# Altium PCB PCB2.PcbDoc
Units mil, origin at the board's own origin, x right, y up, seen from the top; angles counter-clockwise.
Board outline 2379.98 x 1349.93 mil, 2 copper layers (Top Layer, Bottom Layer); 15 components, 11 nets, 41 pads, 11 vias.
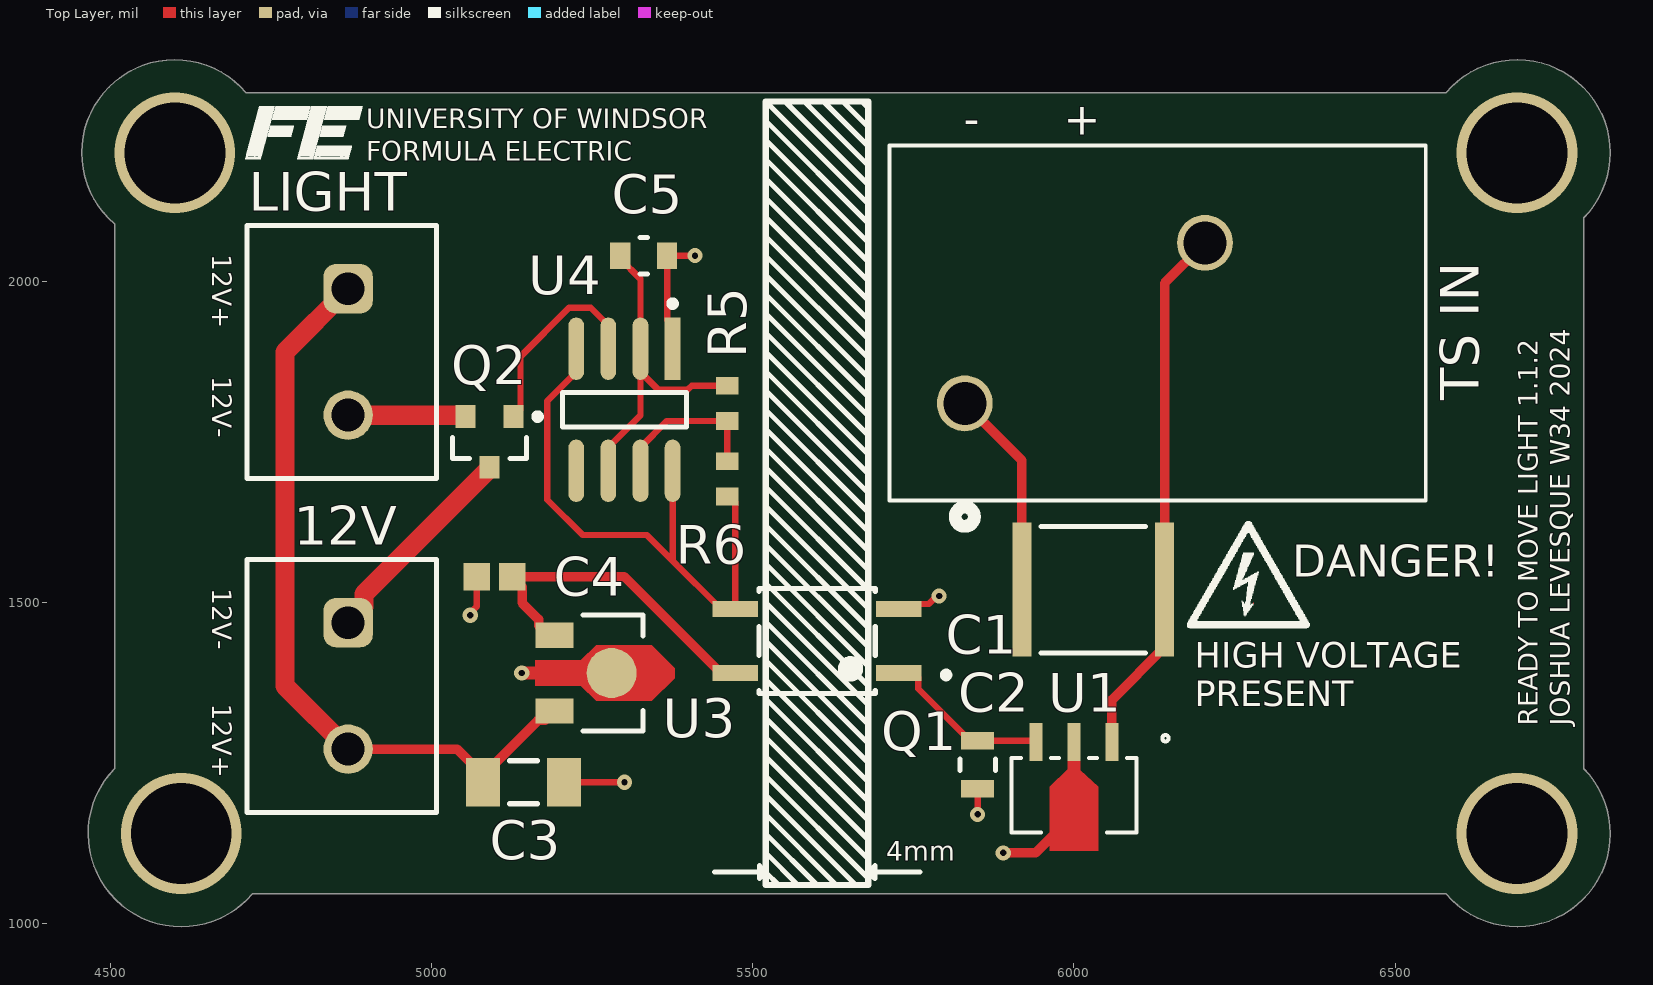
[diagram p0: Top Layer view]
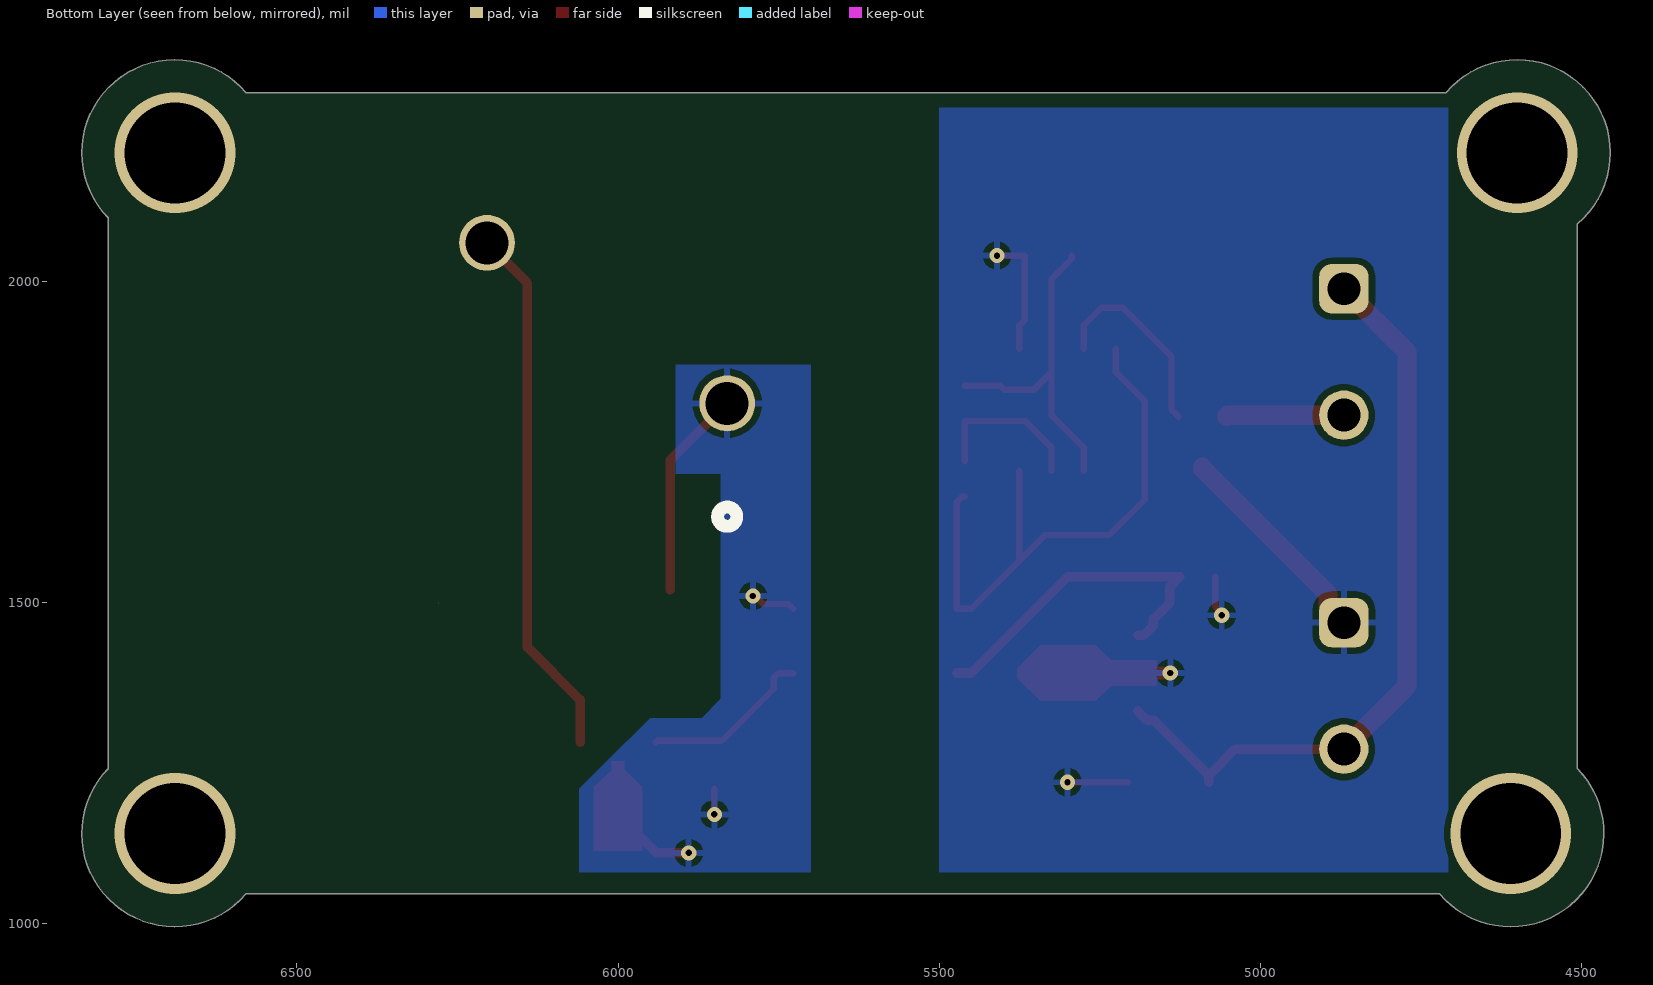
[diagram p1: Bottom Layer view, seen from below]
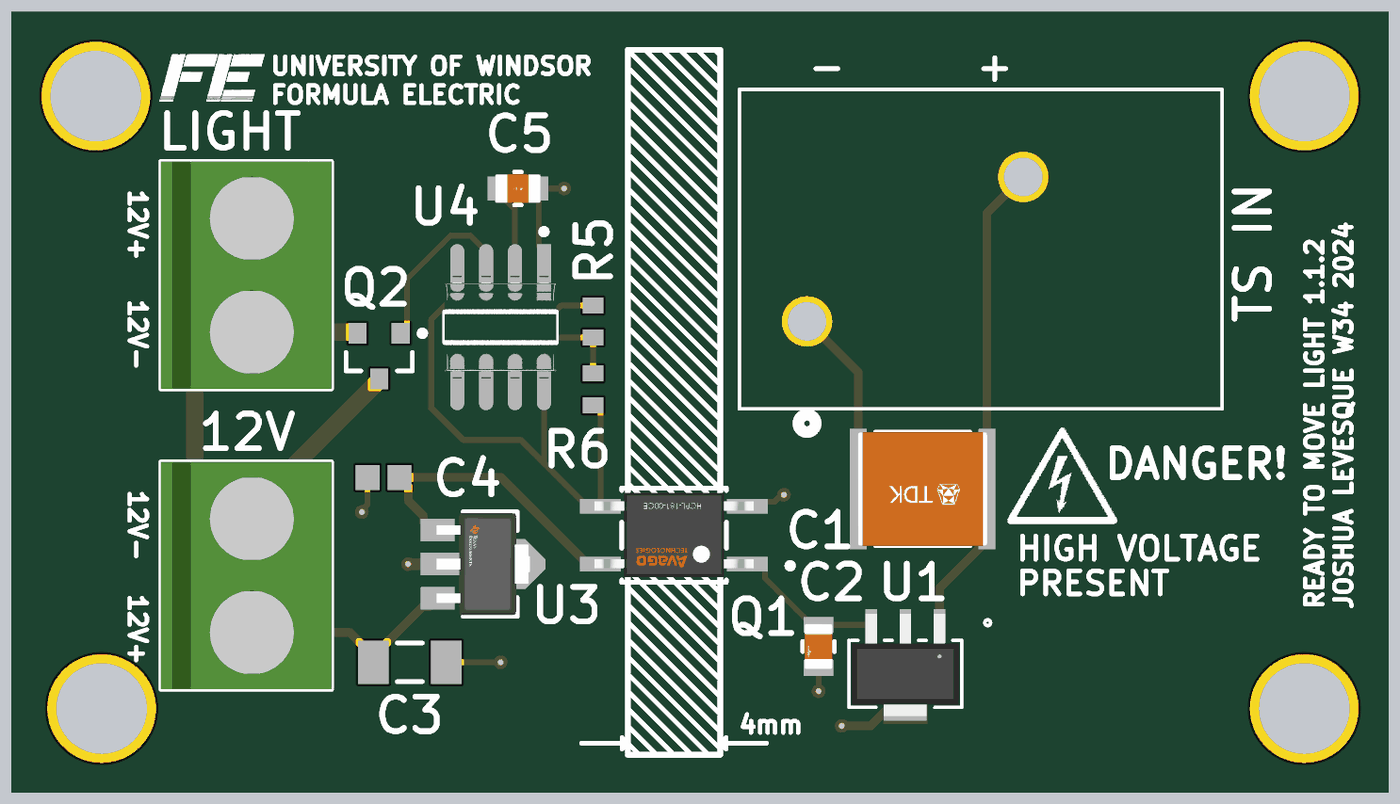
[diagram p2: 3D render of the assembled board from above, using the file's embedded part models]

## Layer stack, top to bottom
Top Solder: solder mask 0.4, Solder Resist, Dk 3.5
Top Layer: signal copper 1.4
Dielectric 1: dielectric 12.6, FR-4, Dk 4.8
Bottom Layer: signal copper 1.4
Bottom Solder: solder mask 0.4, Solder Resist, Dk 3.5

## Board outline
4506.05,1241.11 ccw(c4610,1140) 4720.46,1046.05 6579.54,1046.05 ccw(c6690,1140) 6835.02,1140 ccw(c6690,1140) 6793.95,1241.11 6793.95,2098.89 ccw(c6690,2200) 6835.02,2200 ccw(c6690,2200) 6579.54,2293.95 4710.46,2293.95 ccw(c4600,2200) 4506.05,2089.54

## Design rules (kind name [scope] priority, off if disabled: settings)
Clearance [All] p1: gap=10 ignorepadtopadclearanceinfootprint=FALSE
PolygonConnect [All] p1: connectstyle=Relief reliefconductorwidth=10 reliefentries=4 polygonreliefangle="90 Angle" airgapwidth=10
RoutingVias [All] p1: holewidth=28 width=50 viastyle="Through Hole" minholewidth=28 minwidth=50 maxholewidth=28 maxwidth=50
SolderMaskExpansion [All] p1: expansion=4 istentingtop=FALSE
SupplyNets "Schematic Supply Nets_4" [InNet('-12V')] p1: voltage=0.000
SupplyNets "Schematic Supply Nets_3" [InNet('TS+')] p2: voltage=0.000
SupplyNets "Schematic Supply Nets_2" [InNet('+12V')] p3: voltage=0.000
SupplyNets "Schematic Supply Nets_1" [InNet('TS-')] p4: voltage=0.000
SupplyNets "Schematic Supply Nets" [InNet('+5V')] p5: voltage=0.000
Width [All] p1: maxlimit=10 minlimit=10 preferedwidth=10
30 further rules are at their usual default settings.

## Components (designator, comment, footprint, x,y, rotation, side; value= is the part's Value field where it differs from the comment)
12V "691137710002" 691137710002 4860,1370 r270 top
C1 "2.2uF" FP-C5750-250-0_4-IPC_C 6030,1520 r180 top
C2 "22uF" FP-GRM21B-0_15-MFG 5850,1247.4 r270 top
C3 "CAP 330nF 16V 1206(3216)" CAPC1206(3216)110_M 5142.99,1220 r0 top value=330nF
C4 "VJ0603V104ZXXCW1BC" CAPC1608X95X40ML15T15 5097.56,1540 r180 top
C5 "C2012X5R1E106M125AB" FP-C2012-125-0_2-MFG 5330,2040 r180 top
LIGHT "691137710002" 691137710002 4860,1890 r270 top
Q1 "HCPL-181-00CE" FP-SO-4-MFG 5600,1440 r180 top
Q2 "NTR4170NT1G" ONSC-SOT-23-3-318-08_V 5090,1750 r270 top
R5 "RC0603FR-0724KL" RESC1608X55X25NL10T15 5460,1810 r90 top
R6 "RC0603FR-0724KL" RESC1608X55X25NL10T15 5460,1692.44 r90 top
"TS IN" "1017514" CONN_1017514 5830,1810 r90 top
U1 "" SOT-89-3_2P7X4P7_ONS 6000,1200 r180 top
U3 "UA78L05AIPK" FP-PK0003A-MFG 5277.73,1390 r270 top
U4 "NE555DR" FP-D0008A-IPC_A 5300,1800 r270 top

## Footprints (in the part's own frame and the unit in brackets; to place one, negate y for a bottom-side part, rotate by r counter-clockwise, add the part's x,y. Pads: shape width x height; smd on the part's side, far side on the other; paste and mask are expansions set on the pad)
691137710002 [mm] "Horizontal Cable Entry with Pressure Clamp, pitch 5mm, 02p"
  rrect50% 1.95x1.95 hole 1.3: 1(-2.5,0.25)
  round 1.95 hole 1.3: 2(2.5,0.25)
  silkscreen extent -5,-3.75 5,3.75, body extent -5,-3.75 5,3.75, height 11.6
CAPC1206(3216)110_M [mm] "Chip Capacitor, Body 3.2x1.6mm, Height 1.1mm, IPC Low Density"
  rect 1.35x1.9 smd: 1(-1.6,0) 2(1.6,0)
  silkscreen extent -0.55,-0.85 0.55,0.85, body extent -1.7,-0.9 1.7,0.9, height 1.1
CAPC1608X95X40ML15T15 [mm] "Chip Capacitor, 2-Leads, Body 1.60x0.80mm, IPC Low Density"
  rect 1.05x1.1 smd: 1(-0.7,0) 2(0.7,0)
  body extent -0.88,-0.48 0.87,0.47, height 0.95
CONN_1017514 [mil]
  round 87 / inner round 60 / far side round 87 hole 67 paste-99999 mask+0: 1(0,0) 2(250,-374.02)
  silkscreen extent -191,-718 402,117
FP-C2012-125-0_2-MFG [mm]
  rect 0.8x1.05 smd paste+0 mask+0: 1(-0.925,0) 2(0.925,0)
  silkscreen extent -0.15,-0.72 0.15,0.72, body extent -1.43,-0.82 1.43,0.82, height 0.25
FP-C5750-250-0_4-IPC_C [mm]
  rect 0.753x5.303 smd paste+0 mask+0: 1(-2.825,0) 2(2.825,0)
  silkscreen extent -2.07,-2.5 2.07,2.5, body extent -3.3,-2.8 3.3,2.8, height 0.25
FP-D0008A-IPC_A [mil]
  rect 97.21x24.49 smd paste+0 mask+0: 1(-95.02,75)
  rrect100% 97.21x24.49 smd paste+0 mask+0: 2(-95.02,25) 3(-95.02,-25) 4(-95.02,-75) 5(95.02,-75) 6(95.02,-25) 7(95.02,25) 8(95.02,75)
  silkscreen extent -170,-97 27,97, body extent -163,-116 163,116, height 10
FP-GRM21B-0_15-MFG [mm]
  rect 0.7x1.3 smd paste+0 mask+0: 1(-0.95,0) 2(0.95,0)
  silkscreen extent -0.23,-0.7 0.23,0.7, body extent -1.4,-0.8 1.4,0.8, height 0.25
FP-PK0003A-MFG [mm]
  rect 1x1.5 smd paste+0 mask+0: 1(-1.5,-2.203) 3(1.5,-2.203)
  round 1.98 smd paste+0 mask+0: 2(0,0.058)
  Top Layer region: -0.5,-2.953 -0.5,-1.152 -1.1,-0.553 -1.1,1.647 -0.2,2.548 0.2,2.548 1.1,1.647 1.1,-0.553 0.5,-1.152 0.5,-2.953
  silkscreen extent -2.3,-1.08 2.3,1.3, body extent -2.55,-3.05 2.55,2.65, height 0.25
FP-SO-4-MFG [mm]
  rect 1.8x0.64 smd paste+0 mask+0: 1(-3.23,1.27) 2(-3.23,-1.27) 3(3.23,-1.27) 4(3.23,1.27)
  silkscreen extent -5.23,-2.07 2.3,2.07, body extent -4.23,-2.17 4.23,2.17, height 0.25
ONSC-SOT-23-3-318-08_V [mm] "SOT23, 3-Leads, Body 2.92x1.3mm, Pitch 0.95mm"
  rect 0.9x0.8 smd: 1(-1,0.95) 2(-1,-0.95) 3(1,0)
  silkscreen extent -1.12,-1.46 0.65,2.03, body extent -0.65,-1.46 0.65,1.46, height 1.11
RESC1608X55X25NL10T15 [mm] "Chip Resistor, 2-Leads, Body 1.60x0.80mm, IPC Medium Density"
  rect 0.7x0.9 smd: 1(-0.7,0) 2(0.7,0)
  body extent -0.85,-0.45 0.85,0.45, height 0.55
SOT-89-3_2P7X4P7_ONS [mil]
  rect 20x59 smd paste+0 mask+0: 1(-59.06,-82.5) 2(0,-82.5) 3(59.06,-82.5)
  Top Layer region: 10,-53 -10,-53 -10,-39 -38,-13 -38,87 38,87 38,-13 10,-40
  silkscreen extent -148,-93 98,58, body extent -93,-104 93,73, height 69

## Part data
12V LIGHT: library part CMP-1502-03324-2, Current Rating=16A, Max Operating Temperature=120°C, Min Operating Temperature=-30°C, Voltage Rating=300V, Contact Material="Nickel, Tin", Height=11.6mm, Lead Pitch=5mm, NexarPartId=78871135, Number of Contacts=2, Number of Pins=2, Number of Rows=1, Packaging=Box, RoHS=Non-Compliant
C1: library part CMP-08246-007091-1, "Multilayer Ceramic Capacitors 2.2uF ±20% 450V X6S SMD 2220", Case Code (Imperial)=2220, Case Code (Metric)=5750, Max Operating Temperature=105°C, Min Operating Temperature=-55°C, Package Quantity=500, Tolerance=20%, Voltage Rating=450V, Capacitance=2.2uF, Case/Package=2220, Length=0.224inch, Mount="Surface Mount", Packaging="Tape and Reel", RoHS Compliant=Yes, Series=C, Thickness=0.11inch, Width=0.197inch
C2: library part CMP-2007-03385-2, "Chip Multilayer Ceramic Capacitors for General Purpose, 0805, 22uF, X5R, 15%, 20%, 6.3V", Case Code (Imperial)=0805, Case Code (Metric)=2012, Dielectric=X5R, Max Operating Temperature=85°C, Min Operating Temperature=-55°C, Package Quantity=1, Tolerance=20%, Voltage=6.3V, Capacitance=22uF, Case/Package=0805, Depth=1.25mm, Height=1.25mm, Lead Free="Lead Free", Length=2mm, Material=Ceramic, Mount="Surface Mount", Packaging="Tape and Reel", Radiation Hardening=No, REACH SVHC="No SVHC", Termination=SMD/SMT, Thickness=0.053inch, Voltage Rating=6.3V, Voltage Rating (DC)=6.3V, Width=0.049inch
C3: library part CMP-1037-04464-1, "CAP 330nF 16V ±10% 1206 (3216 Metric) Thickness 1.05mm SMD", Case-EIA=1206, Case-Metric=3216, Rated Voltage="16 V", Tolerance=Â±10%, Max Thickness="1.05 mm", Technology=SMT
C4: library part CMP-1035-02590-2, Manufacturer=Vitramon, Part Number=VJ0603V104ZXXCW1BC
C5: library part CMP-08246-005781-1, "Multilayer Ceramic Capacitors 10μF ±20% 25V X5R SMD 0805", Capacitance=10uF, Case Code (Imperial)=0805, Case Code (Metric)=2012, Dielectric=X5R, Dielectric Material=Ceramic, Max Operating Temperature=85°C, Min Operating Temperature=-55°C, Package Quantity=1, Tolerance=20%, Voltage Rating=25V, Case/Package=0805, Depth=1.25mm, Height=1.25mm, Lead Free="Lead Free", Length=2mm, Mount="Surface Mount", Packaging="Tape and Reel", Resistor Type=Ceramic, RoHS Compliant=Yes, Series=C, Termination=SMD/SMT, Thickness=0.057inch, Voltage Rating (DC)=25V, Weight=0.000194oz, Width=1.2mm
Q1: library part CMP-18400-000021-1, "OPTOISO 3.75KV TRANS 4MINIFLAT", Ambient Temperature Range High=+100°C, Ambient Temperature Range Low=-55°C, Collector Emitter Voltage=80V, Emiiter Collector Voltage=6V, Forward Current=20mA, Forward Voltage=1.2V, Isolation Voltage=3750Vrms, Manufacturer=Broadcom, Max Current Transfer Ratio=400%, Min Current Transfer Ratio=200%, Package=SO-4, Power Dissipation=170mW, Temperature="-55°C to +100°C", Automotive=No, Category=Trans, ComponentLink2Description=Datasheet, ComponentLink2URL=https://docs.broadcom.com/docs/AV02-0774EN, Device Class L1=Optoelectronics, Device Class L2=Optocouplers, Device Class L3=unset, Digikey Description="OPTOISO 3.75KV TRANS 4MINIFLAT", Height=2.4mm, Ipc Land Pattern Name=SOIC254P700X210-4, Lead Free=Yes, Manufacturer Part Number=HCPL-181-00CE, Mouser Description="Transistor Output Optocouplers 3750 Vrms 0.2mA", Octopart=https://octopart.com/hcpl-181-00ce-broadcom-71128032, Reverse Voltage=6V, RoHS=TRUE, Standoff Height=0mm, Temperature Range High=+100°C, Temperature Range Low=-55°C, Turn Off Delay Time=4us, Turn On Delay Time=3us
Q2: library part CMP-1058-00736-1, "Power MOSFET, 30 V, 3.1 A, Single N-Channe, 3-Pin SOT-23, Pb-Free, Tape and Reel", Manufacturer="On Semiconductor", Package Type=SOT-23-3, Channel Polarity="N Channel", Ciss Typ (pF)=432, ComponentLink1Description="Manufacturer URL", ComponentLink1URL=http://www.onsemi.com/, ComponentLink2Description=Datasheet, ComponentLink2URL=http://www.onsemi.cn/pub_link/Collateral/NTR4170N-D.PDF, ComponentLink3Description="Package Specification", ComponentLink3URL=http://www.onsemi.cn/pub_link/Collateral/318-08.PDF, Configuration=Single, Coss Typ (pF)=53.6, Crss Typ (pF)=37.1, DatasheetVersion="Rev. 1", Mounting Technology="Surface Mount", PackageDescription="3-Pin Small Outline Transistor, Body 2.92 x 1.3 mm, Pitch 0.95 mm", PackageReference=SOT-23-3-318-08, PackageVersion="Rev. AP, 11/2009", Packing="Tape and Reel", PartNumber=NTR4170NT1G, Qrr Typ (nC)=2.9, RoHS=Pb-Free, V(BR)DSS Min (V)=30, VGS Max (V)=12, VGS(th) Max (V)=1.4
R5 R6: library part CMP-2000-03968-1, Manufacturer=Yageo, Part Number=RC0603FR-0724KL
"TS IN": library part CMP-002-00077-5, "Barrier Strip Terminal Block", RoHS Compliant=Yes
U1: library part NCP785AH50T1G, "No Description Available", Mfr_Name=onsemi, RefDes=RefDes, Type=Type
U3: library part CMP-04917-000006-1, "IC REG LINEAR 5V 100MA SOT89-3", Dropout Voltage=1.7V, Manufacturer="Texas Instruments", Max Junction Temp=+125°C, Max Supply Voltage=20V, Min Supply Voltage=7V, Output Current=100mA, Output Voltage=5V, Package=PK0003A, Temperature="-40°C to +125°C", Temperature Range Low=-40°C, Automotive=No, Category=IC, ComponentLink2Description=Datasheet, ComponentLink2URL=http://www.ti.com/lit/ds/symlink/ua78l.pdf, Device Class L1="Integrated Circuits (ICs)", Device Class L2="Power Management ICs", Device Class L3="Voltage Regulators - Linear", Digikey Description="IC REG LINEAR 5V 100MA SOT89-3", Height=1.6mm, Lead Free=Yes, Manufacturer Part Number=UA78L05AIPK, Mouser Description="Linear Voltage Regulators 5V 100mA Fixed Pos Voltage Regulator", Number of Outputs=1, Octopart=https://octopart.com/ua78l05aipk-texas+instruments-525592, Output Type=Fixed, RoHS=TRUE, Temperature Range High=+125°C
U4: library part CMP-1685-00007-2, "IC OSC SGL TIMER 100KHZ 8-SOIC", Case/Package=SOIC, Frequency=100kHz, High Level Output Current=-200mA, Low Level Output Current=200mA, Max Operating Temperature=70°C, Max Supply Voltage=16V, Min Operating Temperature=0°C, Min Supply Voltage=4.5V, Operating Supply Current=10mA, Package Quantity=2500, Quiescent Current=15mA, Contact Plating=Gold, Height=1.58mm, Lead Free="Lead Free", Length=4.9mm, Mount="Surface Mount", Number of Pins=8, Number of Timers/Counters=1, Packaging="Tape and Reel", Radiation Hardening=No, REACH SVHC="No SVHC", Weight=0.002561oz, Width=3.91mm

## Via types
v1: diameter 23.62, hole 9.84, Top Layer to Bottom Layer, tented both sides, 7 vias
v2: diameter 188, hole 157, Top Layer to Bottom Layer, 4 vias

## Nets (pads, with @x,y where several pads share a name; then routed paths per layer and width w, separated by ;. In a path a pad name is that pad's centre, name@x,y a point inside that pad or via, vN(x,y) a via of type N, cw(c..) or ccw(c..) an arc to the next point about the centre after c; other vN are vias at no path point)
+5V: C4.1 Q1.4 U3.1 | length 533.9
  Top Layer w15: U3.1 5181.18,1449.06 5166.49,1463.74 5166.49,1473.58 5140.79,1499.29 5140.79,1524.33 C4.1 5300,1540 5450,1390 Q1.4
+12V: 12V.2 C3.1 LIGHT.1 U3.3 | length 1188.7
  Top Layer w15: 12V.2 5039.25,1271.57 C3.1@5080,1230.83 ; C3.1 C3.1@5080,1230.83 ; U3.3 5176.33,1316.26 5165.43,1316.26 C3.1@5080,1230.83
  Top Layer w30: 12V.2 4771.42,1370 4771.42,1890 LIGHT.1
-12V: 12V.1 C3.2 C4.2 C5.1 Q2.3 U3.2 U4.1 | length 823.7
  Top Layer w10: v1(5060,1480) 5060,1483.69 5070,1493.69 C4.2 ; C3.2 v1(5300,1220) ; U4.1 5375,1931.38 5366.42,1939.97 C5.1 v1(5410,2040)
  Top Layer w20: v1(5140,1390) U3.2
  Top Layer w30: 12V.1 4894.47,1493.05 4894.47,1513.13 5090,1708.66 Q2.3
NetC2_1: C2.1 Q1.1 U1.3 | length 268.3
  Top Layer w10: Q1.1 5750,1390 5757.6,1382.4 5757.6,1365.39 5838.19,1284.8 C2.1 5938.64,1284.8 U1.3
NetC5_2: C5.2 R5.2 U4.2 U4.6 | length 517.6
  Top Layer w10: U4.6 5275,1741.34 5325,1791.34 U4.2@5325,1858.66 ; C5.2 5293.58,2035.08 5325,2003.66 U4.2 U4.2@5325,1858.66 ; R5.2 5404.98,1837.56 5398.84,1831.42 5352.25,1831.42 U4.2@5325,1858.66
NetLIGHT_2: LIGHT.2 Q2.2 | length 183.7
  Top Layer w30: LIGHT.2 5050.39,1791.57 Q2.2
NetQ1_3: Q1.3 R6.1 U4.4 U4.8 | length 939.4
  Top Layer w10: U4.4 5225,1858.66 5180,1813.66 5180,1660 5235,1605 5335,1605 5375,1565 ; U4.8 5375,1565 ; R6.1 5463.94,1664.88 5472.83,1655.98 Q1.3 5450,1490 5375,1565
NetQ2_1: Q2.1 U4.3 | length 313.9
  Top Layer w10: Q2.1 5138.15,1800.12 5138.15,1883.06 5213.71,1958.63 5247.75,1958.63 5275,1931.38 U4.3
NetR5_1: R5.1 R6.2 U4.7 | length 250.8
  Top Layer w10: U4.7 5325,1741.34 5366.11,1782.44 R5.1 R6.2
TS+: "TS IN.2" C1.1 U1.1 | length 837.5
  Top Layer w15: U1.1 6059.06,1348.27 6141.22,1430.43 C1.1 6141.22,1997.2 6204.02,2060
TS-: "TS IN.1" C1.2 C2.2 Q1.2 U1.2 | length 572.7
  Top Layer w10: Q1.2 5734.76,1497.6 5773.91,1497.6 5786.31,1510 v1(5790,1510) ; v1(5850,1170) C2.2
  Top Layer w15: 5830,1810 5918.78,1721.22 C1.2 ; v1(5890,1110) 5940,1110 6000,1170
pads on no net: U4.5
copper on no net:
  other v2: 4610,1140 6690,1140 4600,2200 6690,2200

## Polygon pours and split planes (outlines as drawn)
TS- on Bottom Layer "TS-_L02_P003" (solid, pour order 3): 6060,1080 6060,1210 6020,1250 5950,1320 5870,1320 5840,1350 5840,1699.75 5910,1700.33 5910,1790 5910,1840 5910,1870 5880,1870 5700,1870 5700,1080
-12V on Bottom Layer "-12V_L02_P000" (solid, pour order 0): 5500,1080 5500,2270 4707.24,2270 4707.24,1080

## Other copper
Top Layer:
  region: 6280,1498 6278.9,1498 6278.9,1499.1 6280,1499.1

## Silkscreen, mask and mechanical layers (free items; w line width, h text height)
Top Overlay:
  drawing of 89 lines, arcs and shapes, not listed
  text "UNIVERSITY OF WINDSOR" at 4898,2238 h30
  text "-      +" at 5828,2228 h50
  text "FORMULA ELECTRIC" at 4898,2188 h30
  text "12V+" at 4658,2042 h30 r270
  text "12V-" at 4658,1852 h30 r270
  text "DANGER!" at 6340,1540 h50
  text "12V-" at 4658,1522 h30 r270
  text "HIGH VOLTAGE" at 6188,1398 h40
  text "12V+" at 4658,1342 h30 r270
  text "PRESENT" at 6188,1338 h40
  text "READY TO MOVE LIGHT 1.1.2" at 6722,1308 h30 r90
  text "JOSHUA LEVESQUE W34 2024" at 6772,1308 h30 r90
  text "4mm" at 5708,1098 h30
Mechanical 1:
  lines w7.87: 6790,1240 6790,2102.02 ; 4510,1237.98 4510,2090 4510,1237.98 ; 4707.24,2290 6580,2290 4707.24,2290 ; 4717.24,1050 6580,1050 4717.24,1050
  lines w10: 6582.76,1050 ccw(c6690,1140) 6788.99,1238.99 ; 6582.76,2290 cw(c6690,2200) 6790,2102.02 ; 4510,1237.98 ccw(c4610,1140) 4717.24,1050 cw(c4610,1140) 4510,1237.98 ; 4511.35,2091.65 cw(c4600,2200) 4707.24,2290 ccw(c4600,2200) 4511.35,2091.65